# EAGLE board F1Final (EAGLE 7.6.0)

Size 73.58 x 63.39 mm. Coordinates in mm from the lower left corner, seen from the top.
Outline: 0,0 56.82,0 56.82,53.33 0,53.33 0,0
Copper layers (1*16): Top 0.035mm / dielectric 1.5mm / Bottom 0.035mm
Design rules "default": minimum track width 10mil, minimum drill 24mil, track to track 8mil, track to pad 8mil, pad to pad 8mil, via to via 8mil, smd to smd 8mil, copper to edge 40mil, drill to drill 8mil, minimum pad ring 10mil, minimum via ring 8mil, stop-mask expansion 4mil, vias tented up to drill 0mil, thermal gap 10mil

## Footprints (pad centres in the part's own frame; a part is rotated, then mirrored left to right if it is on the bottom)
LED-RGB-THRU = drill 0.762 pad 0.889 long: 1 1.905,0; 2 0.635,0; 3 -0.635,0; 4 -1.905,0
0207/10 = drill 0.813 octagon: 1 -5.08,0; 2 5.08,0
B25V = drill 0.813 long: A 2.54,0.635; E -2.54,0.635; S 0,0.635
TL1105 = drill 1 pad 1.676: 1 -2.25,3.25; 2 2.25,3.25; 3 -2.25,-3.25; 4 2.25,-3.25
ARDUINO_UNO = drill 1.016 pad 1.88: 0 63.5,50.8; 1 60.96,50.8; 2 58.42,50.8; 3 55.88,50.8; 3.3V 35.56,2.54; 4 53.34,50.8; 5 50.8,50.8; 5V 38.1,2.54; 6 48.26,50.8; 7 45.72,50.8; 8 41.656,50.8; 9 39.116,50.8; 10 36.576,50.8; 11 34.036,50.8; 12 31.496,50.8; 13 28.956,50.8; A0 50.8,2.54; A1 53.34,2.54; A2 55.88,2.54; A3 58.42,2.54; A4 60.96,2.54; A5 63.5,2.54; AREF 23.876,50.8; GND 26.416,50.8; GND. 43.18,2.54; GND.. 40.64,2.54; I/OREF 30.48,2.54; N/C 27.94,2.54; RESET 33.02,2.54; SCL 18.796,50.8; SDA 21.336,50.8; VIN 45.72,2.54 | hole 3.2: 66.04,7.62; 66.04,35.56; 15.24,50.8; 13.97,2.54
1X16P-2.54-2.54-11.6-3.0-BLACK-MALE = drill 0.889 pad 1.651 square: 1 0,19.05 | drill 0.889 pad 1.651: 2 0,16.51; 3 0,13.97; 4 0,11.43; 5 0,8.89; 6 0,6.35; 7 0,3.81; 8 0,1.27; 9 0,-1.27; 10 0,-3.81; 11 0,-6.35; 12 0,-8.89; 13 0,-11.43; 14 0,-13.97; 15 0,-16.51; 16 0,-19.05

## Placement (x,y rotation side)
D1  [LED-RGB-THRU]  5,35.48 0 top
D8  [LED-RGB-THRU]  5,137.08 0 top  (outside the outline)
D9  [LED-RGB-THRU]  5,149.78 0 top  (outside the outline)
D10  [LED-RGB-THRU]  5,162.48 0 top  (outside the outline)
D11  [LED-RGB-THRU]  5,175.18 0 top  (outside the outline)
D12  [LED-RGB-THRU]  5,187.88 0 top  (outside the outline)
D13  [LED-RGB-THRU]  5,200.58 0 top  (outside the outline)
D14  [LED-RGB-THRU]  5,213.28 0 top  (outside the outline)
D15  [LED-RGB-THRU]  5,225.98 0 top  (outside the outline)
D16  [LED-RGB-THRU]  5,238.68 0 top  (outside the outline)
D17  [LED-RGB-THRU]  5,251.38 0 top  (outside the outline)
D18  [LED-RGB-THRU]  5,264.08 0 top  (outside the outline)
D19  [LED-RGB-THRU]  5,276.78 0 top  (outside the outline)
D20  [LED-RGB-THRU]  5,289.48 0 top  (outside the outline)
D21  [LED-RGB-THRU]  5,302.18 0 top  (outside the outline)
D22  [LED-RGB-THRU]  5,314.88 0 top  (outside the outline)
D23  [LED-RGB-THRU]  5,327.58 0 top  (outside the outline)
D24  [LED-RGB-THRU]  5,340.28 0 top  (outside the outline)
D25  [LED-RGB-THRU]  5,352.98 0 top  (outside the outline)
D26  [LED-RGB-THRU]  5,365.68 0 top  (outside the outline)
D27  [LED-RGB-THRU]  5,378.38 0 top  (outside the outline)
D28  [LED-RGB-THRU]  5,391.08 0 top  (outside the outline)
D29  [LED-RGB-THRU]  5,403.78 0 top  (outside the outline)
D30  [LED-RGB-THRU]  5,416.48 0 top  (outside the outline)
D31  [LED-RGB-THRU]  5,429.18 0 top  (outside the outline)
D32  [LED-RGB-THRU]  5,441.88 0 top  (outside the outline)
D33  [LED-RGB-THRU]  5,454.58 0 top  (outside the outline)
D34  [LED-RGB-THRU]  5,467.28 0 top  (outside the outline)
D35  [LED-RGB-THRU]  5,479.98 0 top  (outside the outline)
D36  [LED-RGB-THRU]  5,492.68 0 top  (outside the outline)
D37  [LED-RGB-THRU]  5,505.38 0 top  (outside the outline)
D38  [LED-RGB-THRU]  5,518.08 0 top  (outside the outline)
D39  [LED-RGB-THRU]  5,530.78 0 top  (outside the outline)
D40  [LED-RGB-THRU]  5,543.48 0 top  (outside the outline)
R1  110‎Ω  [0207/10]  5,48.18 0 top
R2  110‎Ω  [0207/10]  5,60.88 0 top
R3  110‎Ω  [0207/10]  5,73.58 0 top  (outside the outline)
R4  200‎Ω  [0207/10]  5,86.28 0 top  (outside the outline)
R5  10k‎Ω  [0207/10]  5,111.68 0 top  (outside the outline)
Rpot1  10000‎Ω  [B25V]  5,124.38 0 top  (outside the outline)
S1  [TL1105]  5,98.98 0 top  (outside the outline)
U1  [ARDUINO_UNO]  5,10.08 0 top
U2  [1X16P-2.54-2.54-11.6-3.0-BLACK-MALE]  5,22.78 0 top

## Library data of the parts
D1 D8-D40 R1-R5 Rpot1 S1 U1 U2 = AUTODESK_CIRCUITS_BREADBOARD

## Nets
N$1: R3.1 U1.8
N$2: R2.1 U1.9
N$3: R1.1 U1.10
N$4: R4.1 U2.15
N$5: U1.2 U2.14
N$6: U1.3 U2.13
N$7: U1.4 U2.12
N$8: U1.5 U2.11
N$9: S1.1 U1.1
N$10: R5.2 S1.3
N$11: U1.11 U2.6
N$12: U1.12 U2.4
N$13: R4.2 Rpot1.E S1.4 U1.5V U2.2
N$14: Rpot1.S U2.3
N$15: D1.2 D8.2 D9.2 D10.2 D11.2 D12.2 D13.2 D14.2 D15.2 D16.2 D17.2 D18.2 D19.2 D20.2 D21.2 D22.2 D23.2 D24.2 D25.2 D26.2 D27.2 D28.2 D29.2 D30.2 D31.2 D32.2 D33.2 D34.2 D35.2 D36.2 D37.2 D38.2 D39.2 D40.2 R5.1 Rpot1.A U1.GND U2.1 U2.5 U2.16
N$16: D1.3 D8.3 D9.3 D10.3 D11.3 D12.3 D13.3 D14.3 D15.3 D16.3 D17.3 D18.3 D19.3 D20.3 D21.3 D22.3 D23.3 D24.3 D25.3 D26.3 D27.3 D28.3 D29.3 D30.3 D31.3 D32.3 D33.3 D34.3 D35.3 D36.3 D37.3 D38.3 D39.3 D40.3 R2.2
N$17: D1.1 D8.1 D9.1 D10.1 D11.1 D12.1 D13.1 D14.1 D15.1 D16.1 D17.1 D18.1 D19.1 D20.1 D21.1 D22.1 D23.1 D24.1 D25.1 D26.1 D27.1 D28.1 D29.1 D30.1 D31.1 D32.1 D33.1 D34.1 D35.1 D36.1 D37.1 D38.1 D39.1 D40.1 R1.2
N$18: D1.4 D8.4 D9.4 D10.4 D11.4 D12.4 D13.4 D14.4 D15.4 D16.4 D17.4 D18.4 D19.4 D20.4 D21.4 D22.4 D23.4 D24.4 D25.4 D26.4 D27.4 D28.4 D29.4 D30.4 D31.4 D32.4 D33.4 D34.4 D35.4 D36.4 D37.4 D38.4 D39.4 D40.4 R3.2

## Tracks (layer width: path | path; a pad name or v marks a point on that pad's centre or on a via)
N$1  (1 unrouted)
N$2  (1 unrouted)
N$3  (1 unrouted)
N$4  (1 unrouted)
N$5  (1 unrouted)
N$6  (1 unrouted)
N$7  (1 unrouted)
N$8  (1 unrouted)
N$9  (1 unrouted)
N$10  (1 unrouted)
N$11  (1 unrouted)
N$12  (1 unrouted)
N$13  (4 unrouted)
N$14  (1 unrouted)
N$15  (39 unrouted)
N$16  (34 unrouted)
N$17  (34 unrouted)
N$18  (34 unrouted)